# Altium PCB PCB1.PcbDoc
Units mil, origin at the board's own origin, x right, y up, seen from the top; angles counter-clockwise.
Board outline 4250 x 3190 mil, 2 copper layers (Top Layer, Bottom Layer); 5 components, 0 nets, 135 pads, 0 vias.
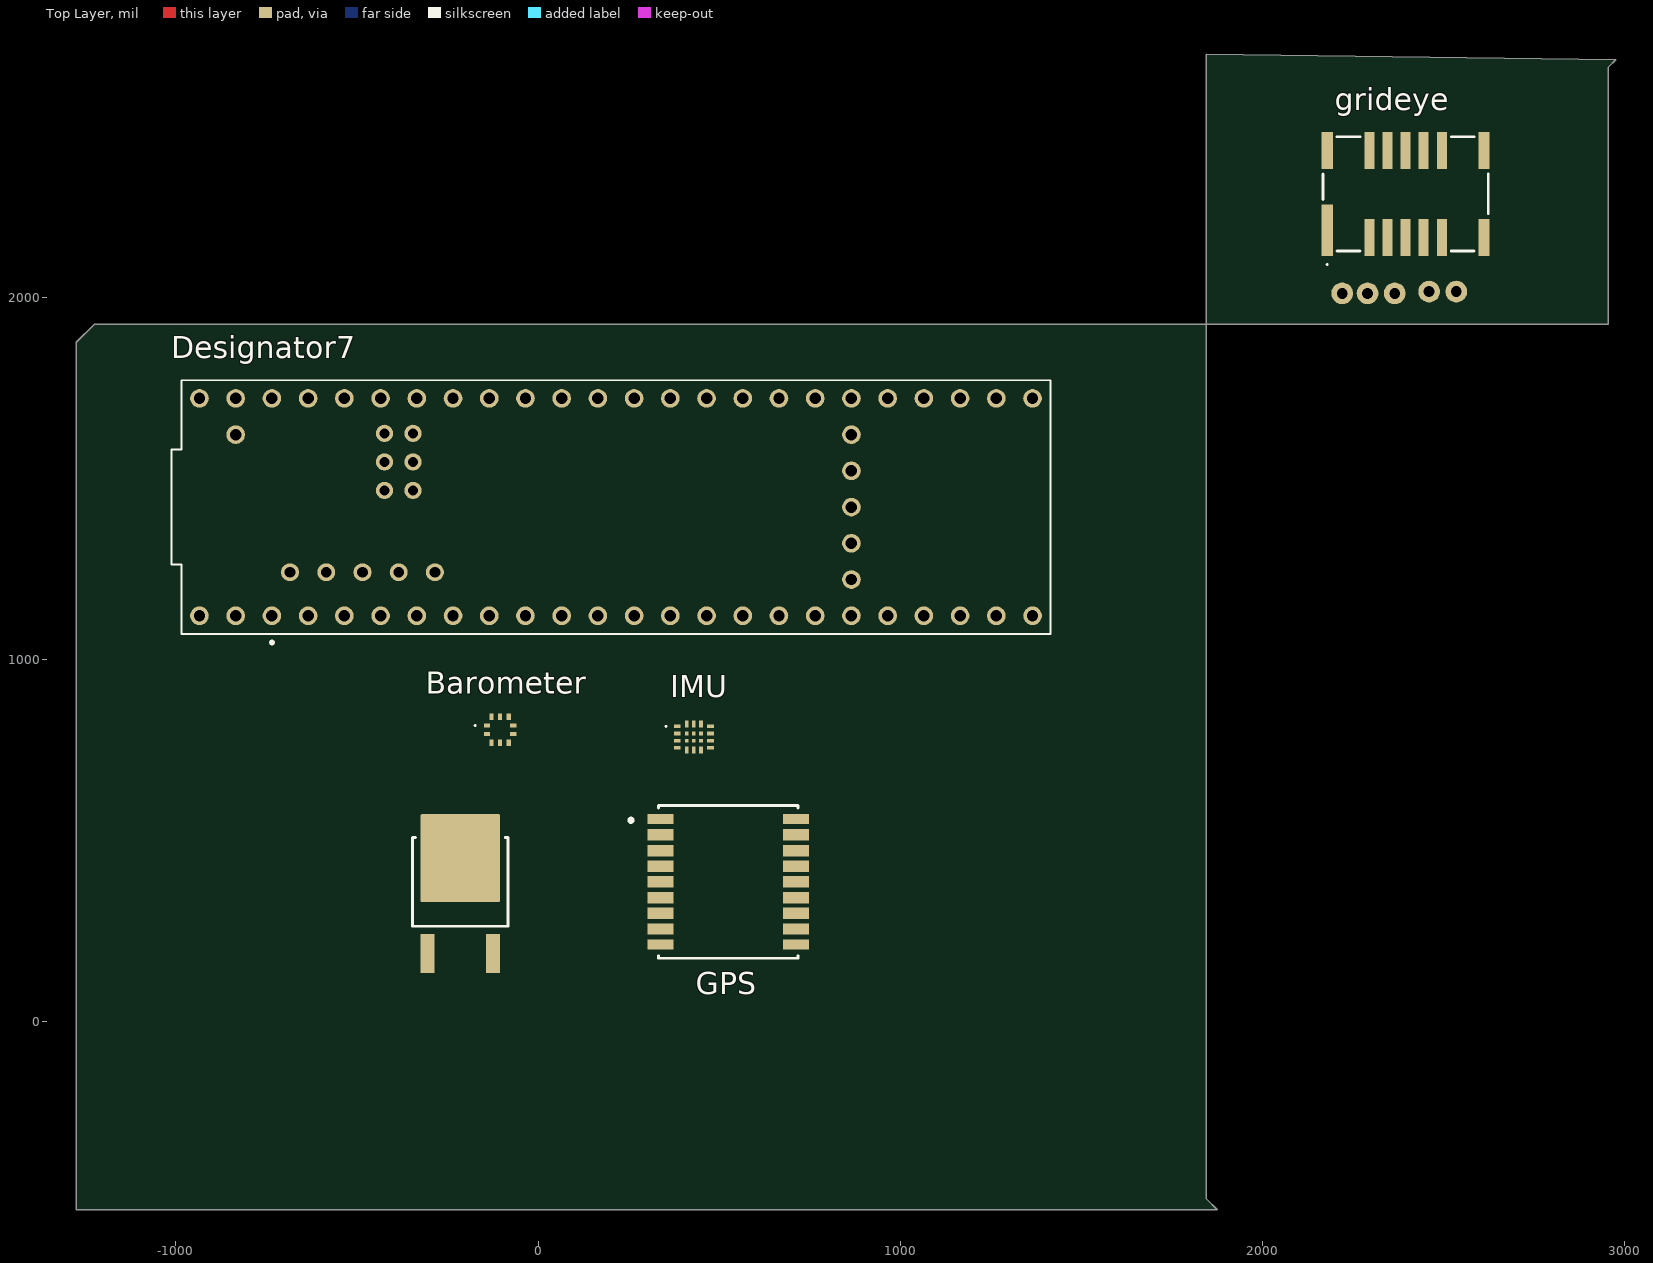
[diagram p0: Top Layer view]
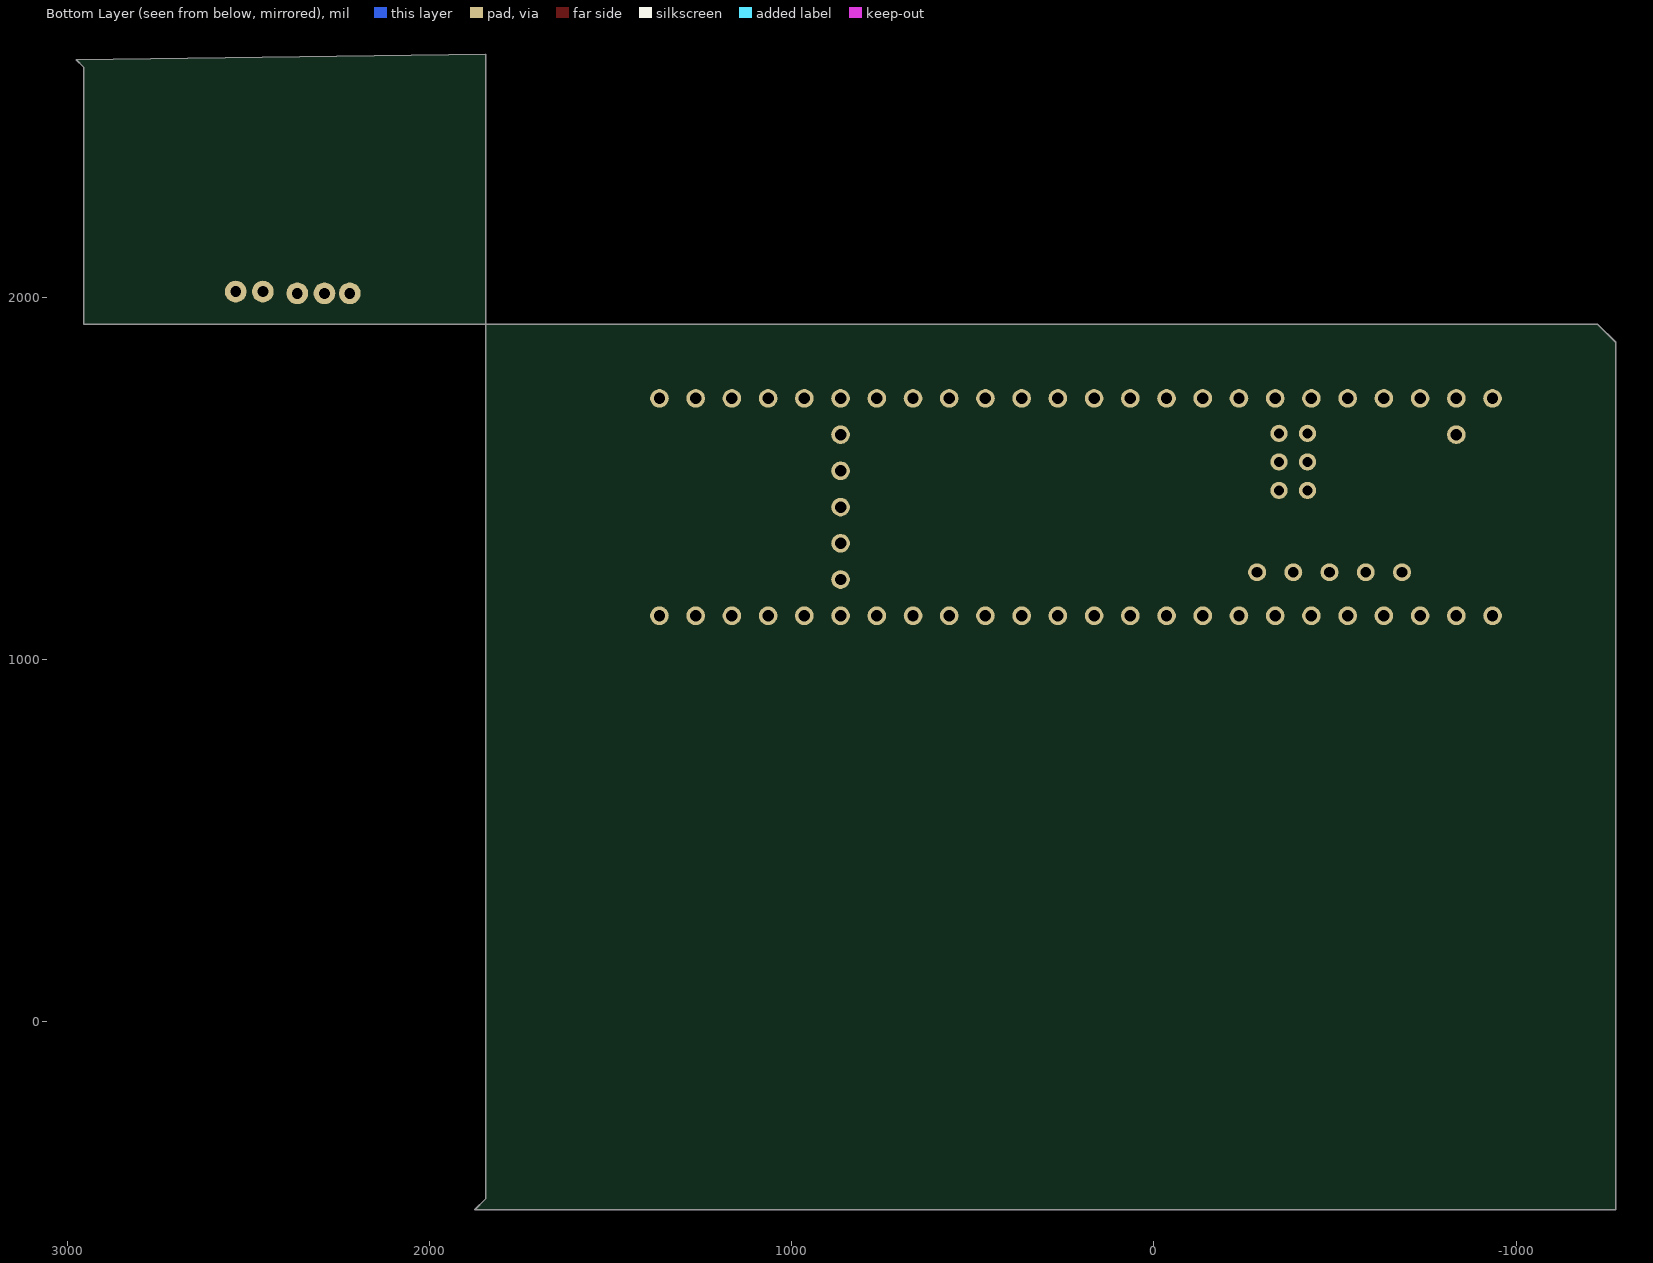
[diagram p1: Bottom Layer view, seen from below]

## Layer stack, top to bottom
Top Solder: solder mask 0.4, Solder Resist, Dk 3.5
Top Layer: signal copper 1.4
Dielectric 1: dielectric 12.6, FR-4, Dk 4.8
Bottom Layer: signal copper 1.4
Bottom Solder: solder mask 0.4, Solder Resist, Dk 3.5

## Board outline
1845,2670 1845,-490 1875,-520 -1275,-520 -1275,1875 -1225,1925 2955,1925 2955,2635 2975,2655

## Design rules (kind name [scope] priority, off if disabled: settings)
Clearance [All] p1: gap=10 ignorepadtopadclearanceinfootprint=FALSE except(0: Arc-Hole Track-Hole SMDPad-Hole THPad-Hole Via-Hole Fill-Hole Poly-Hole Region-Hole Text-Hole)
PolygonConnect [All] p1: connectstyle=Relief reliefconductorwidth=10 reliefentries=4 polygonreliefangle="90 Angle" airgapwidth=10
RoutingVias [All] p1: holewidth=28 width=50 viastyle="Through Hole" minholewidth=28 minwidth=50 maxholewidth=28 maxwidth=50
SolderMaskExpansion [All] p1: expansion=4 istentingtop=FALSE
Width [All] p1: maxlimit=10 minlimit=10 preferedwidth=10
30 further rules are at their usual default settings.

## Components (designator, comment, footprint, x,y, rotation, side; value= is the part's Value field where it differs from the comment)
Barometer "Comment" LPS25HBTR -105,805 r0 top
Designator7 "Comment" MODULE_DEV-16771 215,1420 r0 top
GPS "Comment" FP-MAX-M8Q-0-MFG 525,385 r0 top
grideye "Comment" AMG8854 2395,2284.92 r0 top
IMU "Comment" BHI360 430,785 r0 top

## Footprints (in the part's own frame and the unit in brackets; to place one, negate y for a bottom-side part, rotate by r counter-clockwise, add the part's x,y. Pads: shape width x height; smd on the part's side, far side on the other; paste and mask are expansions set on the pad)
AMG8854 [mm]
  rect 0.8x3.6 smd: 1(-5.5,-2.55)
  rect 0.7x2.6 smd: 2(-2.54,-3.05) 3(-1.27,-3.05) 4(0,-3.05) 5(1.27,-3.05) 6(2.54,-3.05) 9(2.54,3.05) 10(1.27,3.05) 11(0,3.05) 12(-1.27,3.05) 13(-2.54,3.05)
  rect 0.8x2.6 smd: 7(5.5,-3.05) 8(5.5,3.05) 14(-5.5,3.05)
  silkscreen extent -5.8,-5 5.8,4
BHI360 [mm]
  rect 0.475x0.25 smd: 1(-1.163,0.75) 2(-1.163,0.25) 3(-1.163,-0.25) 4(-1.163,-0.75) 8(1.163,-0.75) 9(1.163,-0.25) 10(1.163,0.25) 11(1.163,0.75)
  rect 0.25x0.475 smd: 5(-0.5,-0.913) 6(0,-0.913) 7(0.5,-0.913) 12(0.5,0.912) 13(0,0.912) 14(-0.5,0.912)
  rect 0.25x0.25 smd: 15(-0.5,-0.25) 16(0,-0.25) 17(0.5,-0.25) 18(0.5,0.25) 19(0,0.25) 20(-0.5,0.25)
  silkscreen extent -2,0.7 -1.9,0.8
FP-MAX-M8Q-0-MFG [mm]
  rect 1.8x0.7 smd paste-1000 mask-1000: 1(-4.75,4.4) 9(-4.75,-4.4) 10(4.75,-4.4) 18(4.75,4.4)
  rect 1.8x0.8 smd paste-1000 mask-1000: 2(-4.75,3.3) 3(-4.75,2.2) 4(-4.75,1.1) 5(-4.75,0) 6(-4.75,-1.1) 7(-4.75,-2.2) 8(-4.75,-3.3) 11(4.75,-3.3) 12(4.75,-2.2) 13(4.75,-1.1) 14(4.75,0) 15(4.75,1.1) 16(4.75,2.2) 17(4.75,3.3)
  silkscreen extent -6.95,-5.35 4.9,5.35, body extent -6.35,-5.45 6.35,5.45, height 0.25
LPS25HBTR [mm]
  rect 0.45x0.3 smd: 1(-0.92,0.3) 2(-0.92,-0.3) 6(0.92,-0.3) 7(0.92,0.3)
  rect 0.3x0.45 smd: 3(-0.6,-0.92) 4(0,-0.92) 5(0.6,-0.92) 8(0.6,0.92) 9(0,0.92) 10(-0.6,0.92)
  silkscreen extent -1.8,0.25 -1.7,0.35
MODULE_DEV-16771 [mm]
  round 1.308 hole 0.8: 0(-26.67,-7.62) 1(-24.13,-7.62) 2(-21.59,-7.62) 3(-19.05,-7.62) 3.3V_1(6.35,-7.62) 3.3V_2(-24.13,7.62) 3.3V_3(16.51,-2.54) 4(-16.51,-7.62) 5(-13.97,-7.62) 6(-11.43,-7.62) 7(-8.89,-7.62) 8(-6.35,-7.62) 9(-3.81,-7.62) 10(-1.27,-7.62) 11(1.27,-7.62) 12(3.81,-7.62) 13(3.81,7.62) 14(1.27,7.62) 15(-1.27,7.62) 16(-3.81,7.62) 17(-6.35,7.62) 18(-8.89,7.62) 19(-11.43,7.62) 20(-13.97,7.62) 21(-16.51,7.62) 22(-19.05,7.62) 23(-21.59,7.62) 24(8.89,-7.62) 25(11.43,-7.62) 26(13.97,-7.62) 27(16.51,-7.62) 28(19.05,-7.62) 29(21.59,-7.62) 30(24.13,-7.62) 31(26.67,-7.62) 32(29.21,-7.62) 33(29.21,7.62) 34(26.67,7.62) 35(24.13,7.62) 36(21.59,7.62) 37(19.05,7.62) 38(16.51,7.62) 39(13.97,7.62) 40(11.43,7.62) 41(8.89,7.62) GND1(-29.21,-7.62) GND2(6.35,7.62) GND3(-26.67,7.62) GND4(16.51,0) ON/OFF(16.51,5.08) PROGRAM(16.51,2.54) VBAT(16.51,-5.08) VIN(-29.21,7.62) VUSB(-26.67,5.08)
  round 1.258 hole 0.75: 5V(-22.86,-4.57) D+(-17.78,-4.57) D-(-20.32,-4.57) USB_GND1(-15.24,-4.57) USB_GND2(-12.7,-4.57)
  round 1.208 hole 0.7: GND5(-14.24,3.17) LED(-16.24,3.17) R+(-16.24,5.17) R-(-14.24,5.17) T+(-14.24,1.17) T-(-16.24,1.17)
  silkscreen extent -31.18,-9.6 30.48,8.89, body extent -31.18,-8.89 30.48,8.89, height 7.15

## Free pads (board coordinates)
  rrect10% 39.37x108.27 smd paste+0 mask+0: 1(-305.16,187.17) 3(-124.84,187.17)
  round 60 hole 30: 1(2220,2010) 2(2290,2010) 3(2365,2010) 8(2460,2015) 9(2535,2015)
  rrect2% 218.5x242.13 smd paste-39370.1 mask+0: 4(-215,450.94)

## Nets (pads, with @x,y where several pads share a name; then routed paths per layer and width w, separated by ;. In a path a pad name is that pad's centre, name@x,y a point inside that pad or via, vN(x,y) a via of type N, cw(c..) or ccw(c..) an arc to the next point about the centre after c; other vN are vias at no path point)
pads on no net: Barometer.1 Barometer.2 Barometer.3 Barometer.4 Barometer.5 Barometer.6 Barometer.7 Barometer.8 Barometer.9 Barometer.10 Designator7.0 Designator7.1 Designator7.2 Designator7.3 Designator7.3.3V_1 Designator7.3.3V_2 Designator7.3.3V_3 Designator7.4 Designator7.5 Designator7.5V Designator7.6 Designator7.7 Designator7.8 Designator7.9 Designator7.10 Designator7.11 Designator7.12 Designator7.13 Designator7.14 Designator7.15 Designator7.16 Designator7.17 Designator7.18 Designator7.19 Designator7.20 Designator7.21 Designator7.22 Designator7.23 Designator7.24 Designator7.25 Designator7.26 Designator7.27 Designator7.28 Designator7.29 Designator7.30 Designator7.31 Designator7.32 Designator7.33 Designator7.34 Designator7.35 Designator7.36 Designator7.37 Designator7.38 Designator7.39 Designator7.40 Designator7.41 Designator7.D+ Designator7.D- Designator7.GND1 Designator7.GND2 Designator7.GND3 Designator7.GND4 Designator7.GND5 Designator7.LED Designator7.ON/OFF Designator7.PROGRAM Designator7.R+ Designator7.R- Designator7.T+ Designator7.T- Designator7.USB_GND1 Designator7.USB_GND2 Designator7.VBAT Designator7.VIN Designator7.VUSB GPS.1 GPS.2 GPS.3 GPS.4 GPS.5 GPS.6 GPS.7 GPS.8 GPS.9 GPS.10 GPS.11 GPS.12 GPS.13 GPS.14 GPS.15 GPS.16 GPS.17 GPS.18 grideye.1 grideye.2 grideye.3 grideye.4 grideye.5 grideye.6 grideye.7 grideye.8 grideye.9 grideye.10 grideye.11 grideye.12 grideye.13 grideye.14 IMU.1 IMU.2 IMU.3 IMU.4 IMU.5 IMU.6 IMU.7 IMU.8 IMU.9 IMU.10 IMU.11 IMU.12 IMU.13 IMU.14 IMU.15 IMU.16 IMU.17 IMU.18 IMU.19 IMU.20

## Silkscreen, mask and mechanical layers (free items; w line width, h text height)
Top Overlay:
  lines w7.87: -339.02,507.44 -346.89,507.44 -346.89,262.56 -83.11,262.56 -83.11,507.44 -90.98,507.44
Top Paste:
  drawing of 20 lines, arcs and shapes, not listed
Mechanical 1:
  text "14" at 2055,2375 h60
  text "8" at 2650,2375 h60
  text "1" at 2105,2135 h60
  text "7" at 2655,2130 h60
  text "Voltage reg" at -540,9.99 h60
Top 3D Body:
  lines w7.87: -346.89,262.56 -346.89,507.44 -83.11,507.44 -83.11,262.56 -346.89,262.56
Top Courtyard:
  lines w7.87: -350.83,129.09 -350.83,575.94 -79.17,575.94 -79.17,129.09 -350.83,129.09
Top Assembly:
  lines w7.87: -350.83,129.09 -350.83,575.94 -79.17,575.94 -79.17,129.09 -350.83,129.09
  text ".Designator" at -215,359.91 h39.37
Mechanical 15:
  lines w3.94: -479.21,495.79 -380.79,495.79 -380.79,594.21 -479.21,594.21 -479.21,495.79
Top Component Center:
  lines w3.94: -234.69,385 -195.31,385 ; -215,365.32 -215,404.68

## Text inside footprints (layer, text, board x,y; h text height)
Designator7: Mechanical 13 "Teensy 4.1" at 205.16,1433.39 h50